# Altium PCB WX0.011.441PCB-4.2.PcbDoc (part 1 of 2)
Units mil, origin at the board's own origin, x right, y up, seen from the top; angles counter-clockwise.
Board outline 2922.34 x 6952.07 mil, 2 copper layers (Top Layer, Bottom Layer), stack 62.192 mil thick; 87 components, 60 nets, 354 pads, 196 vias.
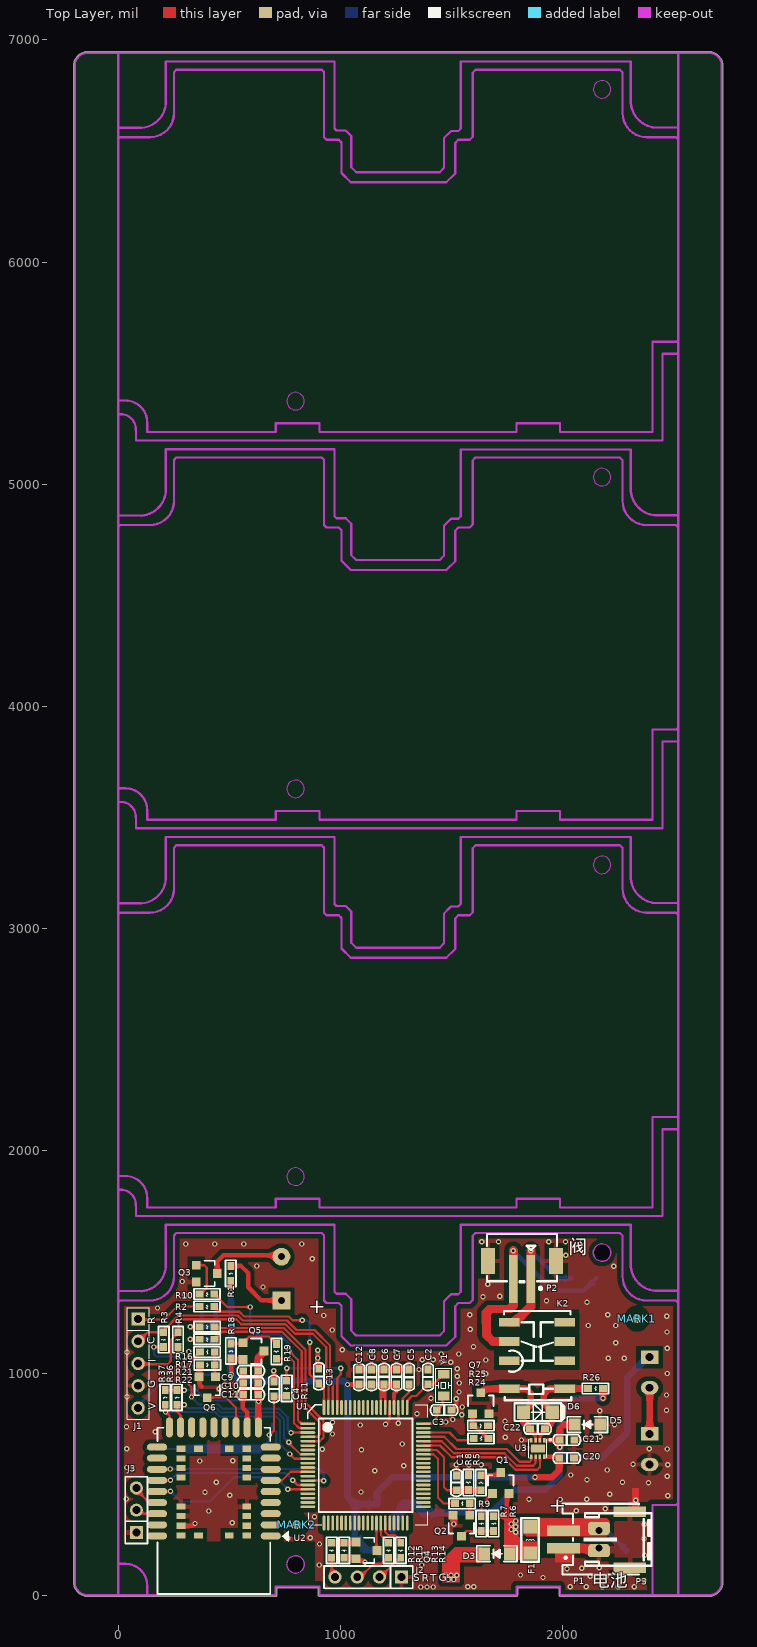
[diagram p0: Top Layer view]
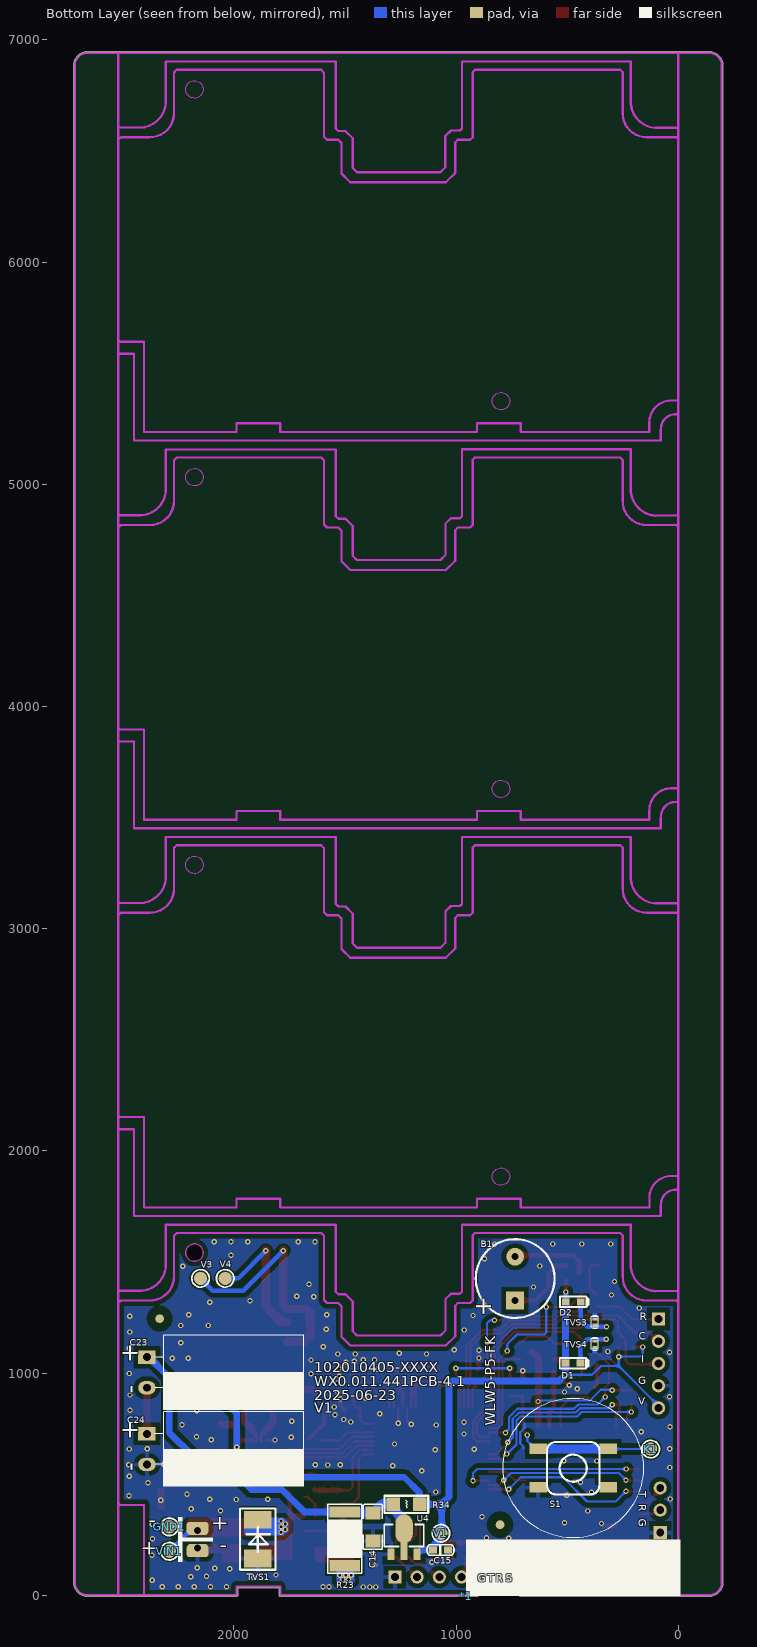
[diagram p1: Bottom Layer view, seen from below]

## Layer stack, top to bottom
Top Solder: solder mask 0.4, Solder Resist, Dk 3.5
Top Layer: signal copper 1.4
Dielectric1: dielectric 59.3921, FR-4, Dk 4.8
Bottom Layer: signal copper 1.4
Bottom Solder: solder mask 0.4, Solder Resist, Dk 3.5

## Board outline
-139.05,-4.95 ccw(c-138.25,0) -138.25,-5.01 708.66,-5.01 ccw(c708.66,0) 712.21,-3.54 ccw(c708.67,0.01) 713.68,0.01 713.68,34.36 900.5,34.36 900.5,0 ccw(c905.51,0) 905.51,-5.01 1791.34,-5.01 ccw(c1791.34,0) 1794.89,-3.54 ccw(c1791.35,0.01) 1796.36,0.01 1796.36,34.36 1983.18,34.36 1983.18,0 ccw(c1988.19,0) 1988.19,-5.01 2404,-5.01 ccw(c2404,0) 2404.27,-5.01 2519.31,-5.01 ccw(c2519.69,-0.01) 2519.69,-5.02 2657.94,-5.02 ccw(c2657.94,-0.01) 2658.74,-4.96 ccw(c2657.01,59.03) 2721.02,59.03 ccw(c2657.01,59.03) 2721.01,60.04 ccw(c2657.01,59.03) 2721.01,60.08 2721.01,59.96 2721.01,6882.02 ccw(c2716,6882.02) 2721.01,6882.32 ccw(c2656.99,6882.99) 2721.01,6882.99 ccw(c2656.99,6882.99) 2658.73,6946.98 ccw(c2657.93,6942.03) 2657.93,6947.04 0.99,6947.04 ccw(c0.99,6942.03) 0.49,6947.02 ccw(c0,6942.03) 0,6947.04 -138.25,6947.04 ccw(c-138.25,6942.03) -139.05,6946.98 ccw(c-137.31,6882.99) -201.32,6881.98 ccw(c-137.31,6882.99) -201.32,6881.94 -201.32,6882.02 -201.32,60.05 cw(c-137.31,59.04) -201.32,60.09 -201.32,60.05 ccw(c-137.31,59.04)
cut-out: 798,99.63 cw(c798,139) 758.63,139 cw(c798,139) 798,178.37 cw(c798,139) 837.37,139 cw(c798,139)
cut-out: 2177,1502.63 cw(c2177,1542) 2137.63,1542 cw(c2177,1542) 2177,1581.37 cw(c2177,1542) 2216.37,1542 cw(c2177,1542)

## Design rules (kind name [scope] priority, off if disabled: settings)
Clearance "Stitching GND" [IsStitchingVia and InNet('GND') vs (IsVia and (Not IsStitchingVia)) Or IsPad] p1: gap=5 ignorepadtopadclearanceinfootprint=FALSE except(0: Arc-Hole Track-Hole SMDPad-Hole THPad-Hole Via-Hole Fill-Hole Poly-Hole Region-Hole Text-Hole)
Clearance VIA-VIA [ISVIA vs ISVIA] p2: gap=20 ignorepadtopadclearanceinfootprint=FALSE except(0: Arc-Hole Track-Hole SMDPad-Hole THPad-Hole Via-Hole Fill-Hole Poly-Hole Region-Hole Text-Hole)
Clearance VIA-PAD [ISVIA vs ISPAD] p3: gap=15 ignorepadtopadclearanceinfootprint=FALSE except(0: Arc-Hole Track-Hole SMDPad-Hole THPad-Hole Via-Hole Fill-Hole Poly-Hole Region-Hole Text-Hole)
Clearance VIA-TRACK [ISVIA vs ISTRACK] p4: gap=15 ignorepadtopadclearanceinfootprint=FALSE except(0: Arc-Hole Track-Hole SMDPad-Hole THPad-Hole Via-Hole Fill-Hole Poly-Hole Region-Hole Text-Hole)
Clearance Polygon [InPolygon] p5: gap=20 ignorepadtopadclearanceinfootprint=FALSE except(0: Arc-Hole Track-Hole SMDPad-Hole THPad-Hole Via-Hole Fill-Hole Poly-Hole Region-Hole Text-Hole)
Clearance [All] p6: gap=7 ignorepadtopadclearanceinfootprint=FALSE except(0: Arc-Hole Track-Hole SMDPad-Hole THPad-Hole Via-Hole Fill-Hole Poly-Hole Region-Hole Text-Hole)
ComponentClearance [All] p1 off: gap=10 collisioncheckmode=3 verticalgap=10 showdistances=FALSE
FabricationTestPointUsage TestPointUsage [All] p1: valid=0 allowmultiple=FALSE
FabricationTestpoint Testpoint [(IsPad And (OnTopLayer Or OnBottomLayer))] p1: side=3 testpointundercomponent=TRUE minsize=40 maxsize=100 preferedsize=60 minholesize=0 maxholesize=40 preferedholesize=32 testpointgrid=1 allowsidetop=TRUE allowsidebottom=TRUE usegrid=TRUE gridtolerance=0.01
HoleSize [All] p1 off: absolutevalues=TRUE maxlimit=300 minlimit=0 maxpercent=80.000 minpercent=20.000
HoleToHoleClearance [All] p1 off: gap=10 allowstackedmicrovias=TRUE
LayerPairs [All] p1 off: enforce=TRUE
MinimumSolderMaskSliver [All] p1 off: minsoldermaskwidth=10
NetAntennae [All] p1 off: netantennaetolerance=0
PlaneConnect [All] p1: planeconnectstyle=Relief reliefexpansion=20 reliefentries=4 reliefconductorwidth=20 reliefairgap=10
PolygonConnect [isvia] p1: connectstyle=Direct reliefconductorwidth=15 reliefentries=4 polygonreliefangle="90 Angle" airgapwidth=10
PolygonConnect PolygonConnect_1 [All] p2: connectstyle=Relief reliefconductorwidth=20 reliefentries=4 polygonreliefangle="90 Angle" airgapwidth=20
RoutingVias [All] p1: holewidth=10 width=20 viastyle="Through Hole" minholewidth=5 minwidth=5 maxholewidth=50 maxwidth=100
SilkToBoardRegionClearance [All] p1 off:
SilkToSilkClearance [All] p1 off: silktosilkclearance=10
SilkToSolderMaskClearance [IsPad] p1 off: minsilkscreentomaskgap=10 clearancetoexposedcopper=TRUE
SolderMaskExpansion [All] p1: expansion=4
Width [All] p1: maxlimit=300 minlimit=8 preferedwidth=8
18 further rules are at their usual default settings.

## Classes and differential pairs
component class WX0.010.436DL: *1 B1 C1 C2 C3 C4 C5 C6 C7 C8 C9 C10 C11 C12 C13 C14 C15 C20 C21 C22 D1 D2 D3 D5 F1 GND1 J1 J2 J3 K1 K2 MARK1 MARK2 P1 P2 P3 Q1 Q2 Q3 Q4 Q5 Q6 Q7 R1 R2 R3 R4 R5 R6 R7 R8 R9 R10 R11 R12 R13 R14 R15 R16 R17 R18 R19 R21 R22 R23 R30 R34 R36 R37 S1 TVS1 TVS3 TVS4 U1 U2 U3 U4 V1 V3 V4 VIN1 Y1

## Components (designator, comment, footprint, x,y, rotation, side; value= is the part's Value field where it differs from the comment)
*1 "Bar Code1" "Bar Code1" 955,-4 r180 bottom
B1 "HYT-0903" HYT-0903 734,1327 r90 bottom
C1 "10pF/50V" CAP0603 1521,539 r270 top
C2 "12pF/50V" CAP0603 1393,950 r90 top
C3 "12pF/50V" CAP0603 1499,833 r180 top
C4 "100nF/50V" CAP0603 700,896 r90 top
C5 "100nF/50V" CAP0603 1308,949.64 r90 top
C6 "100nF/50V" CAP0603 1196.2,1015.14 r270 top
C7 "33pF/50V" CAP0603 1252.6,1015.14 r270 top
C8 "33pF/50V" CAP0603 1138.8,949.64 r90 top
C9 "10uF/10V" CAP0603 629,1010 r180 top
C10 "1uF/16V" CAP0603 629,956 r180 top
C11 "33pFF/16V" CAP0603 629,903 r180 top
C12 "100nF/50V" CAP0603 1082.4,949.64 r90 top
C13 "33pF/50V" CAP0603 902,953 r90 top
C14 "100uF/6V" GRM1206 1374,308 r0 bottom
C15 "1uF/16V" CAP0603 1103,204 r180 bottom
C20 "100nF/50V" CAP0603 2050.5,617.5 r180 top
C21 "100nF/50V" CAP0603 1985.5,699.5 r0 top (schematic designator C10)
C22 "100nF/50V" CAP0603 1919.5,748.5 r180 top (schematic designator C60)
C23 "1F/3V" CAPPC_350_800_1600R 2316,1170 r90 bottom
C24 "1F/3V" CAPPC_350_800_1600R 2316,825 r90 bottom
D1 "LED_T3R" "LED-SMD-0603 - SMT" 507,1045 r180 bottom
D2 "LED_T3R" "LED-SMD-0603 - SMT" 506,1321 r180 bottom
D3 "DS12W" SOD-123FL 1764,187 r180 top
D5 "DS12W" SOD-123FL 2171,768 r180 top (schematic designator D14)
D6 "1N4148" LL34 1888,824 r0 top
F1 "F1206" RES1206 1853,308 r270 top
GND1 "TEST-PAD" TEST-PAD 2290,308 r90 bottom
J1 "PIN254_1*5*WXHJ" PIN254_1*5SR 89,1243 r270 top
J2 "PIN254_1*4*WXHJ" PIN254_1*4*1100S 1275,82 r180 top
J3 "PIN254_1*3" PIN254_1*3*WXHJ 81,283 r90 top
K1 "TEST-PAD" TEST-PAD 124,658 r180 bottom
K2 "HFD4/3-SR" RELAY-SMD_HFD4-XX-SR 1884,1079 r90 top
MARK1 "MARK" MARK 2334,1245 r180 top
MARK2 "MARK" MARK 802,318 r90 top
P1 "" 2P_2.0mm 2003,211 r0 top locked
P2 "" SMT2-2.0_立贴 1817,1464 r180 top locked
P3 "PH200_1*2R" PH200_1*2R_BAT 2163,251 r90 top
Q1 "PNPS-9012" SOT-23 1721,505 r0 top
Q2 "NPNS-9013" SOT-23 1544,313 r180 top (schematic designator Q3)
Q3 "NPNS-9013" SOT-23 398,1448 r270 top (schematic designator Q2)
Q4 "NPNS-9013" SOT-23 1116,202 r270 top
Q5 "UT3401ZG" SOT-23 609,1099 r270 top
Q6 "NPNS-9013" SOT-23 400,936 r180 top
Q7 "NPNS-9013" SOT-23 1631,864 r0 top
R1 "51 1%" RES0603 506,1482 r270 top
R2 "100R 5%" RES0603 432,1299 r180 top
R3 "10K 5%" RES0603 204,1117 r90 top
R4 "10K 5%" RES0603 268,1117 r90 top
R5 "330K 5%" RES0603 1632,540 r270 top
R6 "10K 5%" RES0603 1688,289 r90 top (schematic designator R10)
R7 "10K 5%" RES0603 1633,289 r90 top (schematic designator R15)
R8 "220K 5%" RES0603 1575,474 r90 top (schematic designator R14)
R9 "3K 5%" RES0603 1514.63,413 r0 top (schematic designator R13)
R10 "3K 5%" RES0603 432,1355 r180 top
R11 "1K 5%" RES0603 757,898 r90 top
R12 "3K 5%" RES0603 960,169 r90 top
R13 "1K 5%" RES0603 1216,169 r90 top
R14 "1K 5%" RES0603 1271,169 r90 top
R15 "1K 5%" RES0603 1016,169 r90 top
R16 "1K 5%" RES0603 433,1208 r180 top
R17 "1K 5%" RES0603 433,1152 r180 top
R18 "2M 5%" RES0603 507,1133 r270 top
R19 "200K 5%" RES0603 711,1064 r90 top
R21 "3K 5%" RES0603 367,1095 r0 top
R22 "20K 5%" RES0603 434,1037 r180 top
R23 "10R 2W 1%" RES2512 1501,254 r90 bottom
R24 "4.7K 5%" RES0603 1599,706 r0 top
R25 "47K 5%" RES0603 1664,763 r180 top
R26 "10" RES0603 2114,931 r0 top
R34 "0R 5%" RES1206 1164,409 r0 bottom
R36 "10K 5%" RES0603 264,924 r270 top
R37 "10K 5%" RES0603 211,924 r270 top
S1 "SWT_4_600_600_430" SWS_4_600_600 472.74,572 r180 bottom
TVS1 "" DO-214AA 1892,160 r90 bottom
TVS3 "" ESD_DFN1006_2L 375,1242 r270 bottom (schematic designator D2)
TVS4 "" ESD_DFN1006_2L 375,1117 r90 bottom (schematic designator D2)
U1 "FM33LG0x8" LQFP80 1112.63,585 r0 top locked
U2 "L-NLEEB21-G5BP4" L-NLEEB21-G5BP4 686,267 r180 top locked
U3 "DRV8837DSGR" S-PWSON-N8 1887.5,660.5 r270 top (schematic designator U1)
U4 "CE6232A33P" SOT-89 1234,220 r180 bottom
V1 "TEST-PAD" TEST-PAD 1068,279 r180 bottom
V3 "TEST-PAD" TEST-PAD 2150,1426 r180 bottom
V4 "TEST-PAD" TEST-PAD 2039,1426 r180 bottom locked
VIN1 "TEST-PAD" TEST-PAD 2290,198 r0 bottom
Y1 "32.768kD" SMD-3215_2P 1464,995 r270 top

## Footprints (in the part's own frame and the unit in brackets; to place one, negate y for a bottom-side part, rotate by r counter-clockwise, add the part's x,y. Pads: shape width x height; smd on the part's side, far side on the other; paste and mask are expansions set on the pad)
2P_2.0mm [mm]
  rect 3.8x1.2 smd paste+0 mask+0.05: 1(0,0) 2(0,2)
  rect 3.7x1.2 smd paste+0 mask+0.05: 3(7.6,4.2) 4(7.6,-2.2)
  silkscreen extent -0.1,-3 9.18,5.1
"Bar Code1" [mil]
  silkscreen extent 0,0 965,256
CAP0603 [mil]
  rect 35x31 smd: 1(-0.49,0) 2(66.51,0)
  silkscreen extent -29,-24 94,23, body extent 1,-15 72,15, height 20
CAPPC_350_800_1600R [mm]
  rect 1.524x2 hole 0.9: 1(-2.5,1.905)
  oval 1.524x2 hole 0.9: 2(-6,1.905)
  silkscreen extent -8.5,-16 0,1.02, body extent -8.22,-15.94 -0.22,1.56, height 7.99
DO-214AA [mil]
  rect 80x125 smd: 1(5,0) 2(180,0)
  silkscreen extent -45,-80 230,80, body extent -13,-77 203,77, height 96
ESD_DFN1006_2L [mm]
  rect 0.3x0.6 smd paste+0 mask+0.05: 1(0,0) 2(0.65,0)
  silkscreen extent -0.43,-0.4 1.08,0.4
GRM1206 [mm]
  rect 1.728x1.485 smd: 1(0,-1.593) 2(0,1.593)
  silkscreen extent -1.09,-2.56 1.09,2.56
HYT-0903 [mil]
  rect 80x80 hole 32: 1(0,0)
  round 80 hole 32: 2(196.85,0)
  silkscreen extent -79,-177 276,177, body extent -78,-176 276,176, height 217
L-NLEEB21-G5BP4 [mm]
  oval 2.3x0.8 smd mask+0.051: 1(0,0) 2(0,-1.27) 3(0,-2.54) 4(0,-3.81) 5(0,-5.08) 6(0,-6.35) 7(0,-7.62) 8(0,-8.89) 9(0,-10.16) 19(13,-10.16) 20(13,-8.89) 21(13,-7.62) 22(13,-6.35) 23(13,-5.08) 24(13,-3.81) 25(13,-2.54) 26(13,-1.27) 27(13,0)
  oval 1.5x0.8 on Mech1 mask+0.051: 1(0.4,0) 2(0.4,-1.27) 3(0.4,-2.54) 4(0.4,-3.81) 5(0.4,-5.08) 6(0.4,-6.35) 7(0.4,-7.62) 8(0.4,-8.89) 9(0.4,-10.16) 19(12.6,-10.16) 20(12.6,-8.89) 21(12.6,-7.62) 22(12.6,-6.35) 23(12.6,-5.08) 24(12.6,-3.81) 25(12.6,-2.54) 26(12.6,-1.27) 27(12.6,0)
  rect 0.4x0.4 on Mech1 paste-2 mask+0.102: 1(10.22,1.04) 2(12.05,1.04)
  oval 0.8x1.5 on Mech1 mask+0.051: 10(1.42,-12.01) 11(2.69,-12.01) 12(3.96,-12.01) 13(5.23,-12.01) 14(6.5,-12.01) 15(7.77,-12.01) 16(9.04,-12.01) 17(10.31,-12.01) 18(11.58,-12.01)
  oval 0.8x2.3 smd mask+0.051: 10(1.42,-12.41) 11(2.69,-12.41) 12(3.96,-12.41) 13(5.23,-12.41) 14(6.5,-12.41) 15(7.77,-12.41) 16(9.04,-12.41) 17(10.31,-12.41) 18(11.58,-12.41)
  rect 1x0.7 smd: 28(10.25,-6.66) 29(10.25,-3.36) 30(10.25,-2.26) 31(10.25,-1.16) 32(10.25,-0.06) 33(8.25,-0.06) 34(4.75,-0.06) 35(2.75,-0.06) 36(2.75,-1.16) 37(2.75,-2.26) 38(2.75,-3.36) 39(2.75,-6.66) 40(2.75,-7.76) 41(2.75,-8.86) 42(2.75,-9.96) 43(4.75,-9.96) 44(8.25,-9.96) 45(10.25,-9.96) 46(10.25,-8.86) 47(10.25,-7.76)
  silkscreen extent -2.04,-12.36 12.95,6.64, body extent 0.05,-12.36 12.95,6.64, height 3
"LED-SMD-0603 - SMT" [mil]
  rect 35x31 smd: 1(0,0) 2(67,0)
  silkscreen extent -26,-24 104,23, body extent 0,-14 65,14, height 27
LL34 [mil] "1N4148"
  rect 60x60 smd: 1(-65,0) 2(65,0)
  silkscreen extent -105,-40 120,40, body extent -64,-29 74,30, height 61
LQFP80 [mm]
  oval 1.7x0.3 smd: 1(-6.6,4.75) 2(-6.6,4.25) 3(-6.6,3.75) 4(-6.6,3.25) 5(-6.6,2.75) 6(-6.6,2.25) 7(-6.6,1.75) 8(-6.6,1.25) 9(-6.6,0.75) 10(-6.6,0.25) 11(-6.6,-0.25) 12(-6.6,-0.75) 13(-6.6,-1.25) 14(-6.6,-1.75) 15(-6.6,-2.25) 16(-6.6,-2.75) 17(-6.6,-3.25) 18(-6.6,-3.75) 19(-6.6,-4.25) 20(-6.6,-4.75) 41(6.6,-4.75) 42(6.6,-4.25) 43(6.6,-3.75) 44(6.6,-3.25) 45(6.6,-2.75) 46(6.6,-2.25) 47(6.6,-1.75) 48(6.6,-1.25) 49(6.6,-0.75) 50(6.6,-0.25) 51(6.6,0.25) 52(6.6,0.75) 53(6.6,1.25) 54(6.6,1.75) 55(6.6,2.25) 56(6.6,2.75) 57(6.6,3.25) 58(6.6,3.75) 59(6.6,4.25) 60(6.6,4.75)
  oval 0.3x1.7 smd: 21(-4.75,-6.6) 22(-4.25,-6.6) 23(-3.75,-6.6) 24(-3.25,-6.6) 25(-2.75,-6.6) 26(-2.25,-6.6) 27(-1.75,-6.6) 28(-1.25,-6.6) 29(-0.75,-6.6) 30(-0.25,-6.6) 31(0.25,-6.6) 32(0.75,-6.6) 33(1.25,-6.6) 34(1.75,-6.6) 35(2.25,-6.6) 36(2.75,-6.6) 37(3.25,-6.6) 38(3.75,-6.6) 39(4.25,-6.6) 40(4.75,-6.6) 61(4.75,6.6) 62(4.25,6.6) 63(3.75,6.6) 64(3.25,6.6) 65(2.75,6.6) 66(2.25,6.6) 67(1.75,6.6) 68(1.25,6.6) 69(0.75,6.6) 70(0.25,6.6) 71(-0.25,6.6) 72(-0.75,6.6) 73(-1.25,6.6) 74(-1.75,6.6) 75(-2.25,6.6) 76(-2.75,6.6) 77(-3.25,6.6) 78(-3.75,6.6) 79(-4.25,6.6) 80(-4.75,6.6)
  silkscreen extent -6.62,-6.81 7.1,6.91, body extent -5.33,-5.33 5.36,5.33, height 2
MARK [mm]
  round 1 smd: 0(0,0)
  round 1 smd far side: 1(0,0)
  Top Layer pour cut-out: -1.5,0 -1.386,-0.574 -1.061,-1.061 -0.574,-1.386 0,-1.5 0,-1.5 0.574,-1.386 1.061,-1.061 1.386,-0.574 1.5,0 1.5,0 1.386,0.574 1.061,1.061 0.574,1.386 0,1.5 0,1.5 -0.574,1.386 -1.061,1.061 -1.386,0.574 -1.5,0
  Bottom Layer pour cut-out: -1.5,0 -1.386,-0.574 -1.061,-1.061 -0.574,-1.386 0,-1.5 0,-1.5 0.574,-1.386 1.061,-1.061 1.386,-0.574 1.5,0 1.5,0 1.386,0.574 1.061,1.061 0.574,1.386 0,1.5 0,1.5 -0.574,1.386 -1.061,1.061 -1.386,0.574 -1.5,0
PH200_1*2R_BAT [mm]
  rrect50% 1.2x2.5 all layers, no hole: 1(-1.397,0) 2(1.397,0)
  oval 1x2.5 hole 0.8: 1(-1,0) 2(1,0)
  silkscreen extent -3,-6 3,1.78, body extent -3.17,-6.22 3.18,1.78, height 5
PIN254_1*3*WXHJ [mm]
  rect 1.5x1.5 hole 0.9: 1(0,0)
  round 1.5 hole 0.9: 2(2.54,0) 3(5.08,0)
  silkscreen extent -1.27,-1.27 6.35,1.27
PIN254_1*4*1100S [mm] "Connector; Header; 4 Position"
  rect 1.5x1.5 hole 0.9: 1(0,0)
  round 1.5 hole 0.9: 2(2.54,0) 3(5.08,0) 4(7.62,0)
  silkscreen extent -1.27,-1.27 8.89,1.27, body extent -1.3,-1.3 8.86,1.24, height 8.54
PIN254_1*5SR [mil]
  rect 60x60 hole 35: 1(0,0)
  round 60 hole 35: 2(100,0) 3(200,0) 4(300,0) 5(400,0)
  silkscreen extent -50,-50 450,50
RELAY-SMD_HFD4-XX-SR [mm]
  rect 1x2.3 smd: 1(-3.8,-3.175) 2(-0.6,-3.175) 3(1.602,-3.175) 4(3.8,-3.175) 5(3.8,3.175) 6(1.6,3.175) 7(-0.6,3.175) 8(-3.8,3.175)
  silkscreen extent -5.11,-3.93 5.09,3.77
RES0603 [mil]
  rect 35x31 smd: 1(0,0) 2(67,0)
  silkscreen extent -26,-24 92,23, body extent 0,-15 71,15, height 12
RES1206 [mil]
  rect 60x60 smd: 1(0,0) 2(118.11,0)
  silkscreen extent -39,-39 157,39, body extent -28,-29 150,29, height 20
RES2512 [mil]
  rect 50.49x136.06 smd paste-3937.01 mask+2: 1(-120.72,0) 2(120.72,0)
  silkscreen extent -155,-77 155,77
S-PWSON-N8 [mm]
  rect 0.5x0.28 smd: 1(-0.95,0.75) 2(-0.95,0.25) 3(-0.95,-0.25) 4(-0.95,-0.75) 5(0.95,-0.75) 6(0.95,-0.25) 7(0.95,0.25) 8(0.95,0.75)
  rect 0.9x1.6 smd: 9(0,0)
  silkscreen extent -1.09,-1.05 1.04,1.52, body extent -0.98,-1 1.02,1, height 0.77
SMD-3215_2P [mm]
  rect 1x1.3 smd: 1(0,0) 2(2.5,0)
  silkscreen extent -0.69,-0.91 3.19,0.91, body extent -0.3,-0.99 2.9,0.99, height 0.7
SMT2-2.0_立贴 [mm]
  rect 1x5.5 smd mask+0.051: 1(-1,1.025) 2(1,1.025)
  rect 1.6x3 smd mask+0.051: 3(-3.9,-1.025) 4(3.9,-1.025)
  silkscreen extent -4,-4.1 4,2.25
SOD-123FL [mm]
  rect 1.3x1.4 smd: 1(0.074,0) 2(2.974,0)
  silkscreen extent -0.78,-0.9 3.82,0.9, body extent -0.28,-0.82 3.32,0.82, height 0.95
SOT-23 [mil]
  rect 40x40 smd: 1(-37.4,-47.24) 2(37.4,-47.24) 3(0,47.24)
  silkscreen extent -57,-12 57,35, body extent -57,-55 57,55, height 47
SOT-89 [mm]
  rect 0.8x1.27 smd: 1(-1.5,-0.9) 3(1.5,-0.9)
  rect 0.8x2.54 smd: 2(0,-0.265)
  oval 2x3.3 smd: 2(0,2)
  silkscreen extent -2.25,0 2.25,2.5, body extent -2.25,-1.02 2.25,2.92, height 1.4
SWS_4_600_600 [mm]
  rect 2x1.2 smd: 1(-4,2.2) 1(4,2.2) 2(-4,-2.2) 2(4,-2.2)
  silkscreen extent -3,-3 3,3, body extent -3.18,-3.18 3.18,3.18, height 4.5
TEST-PAD [mm]
  round 1.5 smd: 1(0,0)
  silkscreen extent -1,-1 1,1

## Part data
*1: library part "AD_WXHJ_Bar Code_02", "条形码 ,填充，无需焊接器件"
B1: library part 1010602-0007, "直插,直径9mm,高5.5mm,5 V,2 V,30 mA,兴化市华宇电子有限公司,HYT-0903"
C1: library part 101020103-0014, "10pF,50 V,±5%,0603,X7R,国巨,CC0603JRNPO9BN100"
C2 C3: library part 101020103-0005, "12P,50 V,±5%,0603,国巨,CC0603JRNPO9BN12"
C4 C5 C6 C12 C20 C21 C22: library part 101020103-0021, "104pF,50 V,±10%,0603,国巨,CC0603KRX7R9BB104"
C7 C8 C13: library part 101020103-0027, "33pF,50 V,±10%,0603,国巨,CC0603KRNPO9BN33"
C9: library part 101020103-0026, "106pF,10 V,±10%,0603,村田,GRM188R61A106KE47D"
C10 C11 C15: library part 101020103-0003, "105pF,16 V,±10%,0603,国巨,CC0603KRX7R7BB105"
C14: library part 101020102-0012, "226P,10 V,±20%,0805,村田电子有限公司,GRM21BR61A226ME51L"
C23 C24: library part 1010202-0015, "1F,2.75 V,-20%~+20%,8mm*16mm,红宝石,2.7 DMC 1 M MY4 8X16"
D1 D2: library part 101040102-0001, "圆形插件,3mm 圆形,插件,红光,湖北匡通电子有限公司,3BB4HC"
D3 D5: library part 101040101-0055, "DS36W,SOD123-FL,3 A,42 V,60 V,浙江领晨科技有限公司,DS36W"
D6: library part DIODE, "二极管，Diode"
GND1 K1 V1 V3 V4 VIN1: library part AD_WXHJ_TEST-PAD_01, "单面焊盘测试点"
J1: library part AD_WXHJ_PinHeader_02, "1*5 ，Φ1.0 ，2.54mm，直脚,无需焊接器件"
J2: library part AD_WXHJ_PinHeader_01, "1*4 ，Φ1.0 ，2.54mm，直脚,无需焊接器件"
MARK1 MARK2: library part AD_WXHJ_MARK_01, "MARK点"
P1 P2: library part SMT_2.0_卧
P3: "2.0-2AW,直插弯座，2PIN，脚间距2mm，带防翘起,公头,单排,2.0-2AW;直插弯座，2PIN,脚间距2mm，带防翘起"
Q1: library part 101040201-0001, "9012,PNP,SOT-23,JCET;长电,S9012"
Q2 Q3 Q4 Q6 Q7: library part 101040201-0002, "9013,NPN,SOT-23,长电,S9013"
Q5: library part 101040201-0013, "UT3401ZG,P-MOS,SOT-23,UTC,UT3401ZG"
R1: library part 101010103-0037, "国巨,±5%,0603,,155 ℃,-55 ℃,RC0603JR-0751RL,无铅,100 ppm/℃,1/10W,,51欧"
R2: library part 101010103-0022, "100R,±5%,1/10W,0603,国巨,RC0603JR-07100RL"
R3 R4 R6 R7 R36 R37: library part 101010103-0003, "国巨,±5%,0603,,155 ℃,-55 ℃,RC0603JR-0710KL,无铅,200 ppm/℃,1/10W,,10K"
R5: library part 101010103-0066, "330K,±5%,1/10W,0603,国巨,RC0603JR-07330KL"
R8: library part 101010103-0044, "220K,±5%,1/10W,0603,国巨,RC0603JR-07220KL"
R9 R10 R11 R12 R21 R24 R26: library part 101010103-0006, "国巨,±5%,0603,,155 ℃,-55 ℃,RC0603JR-073KL,无铅,100 ppm/℃,1/10W,,3K"
R13 R14 R15 R16 R17 R34: library part 101010103-0008, "1K,±5%,1/10W,0603,国巨,RC0603JR-071KL"
R18: library part 101010103-0025, "国巨,±5%,0603,,155 ℃,-55 ℃,RC0603JR-072ML,含铅,100 ppm/℃,1/10W,,2M"
R19: library part 101010103-0003, "10K±5%,1/10W,0603"
R22 R25: library part 101010103-0004, "国巨,±5%,0603,,155 ℃,-55 ℃,RC0603JR-0720KL,无铅,200 ppm/℃,1/10W,,20K"
R23: library part 101010105-0001, "0.5Ω,±1%,1W,2512,国巨,RC2512FR-070R5L"
S1: library part 1011001-0027, "TS-1102,机械轻触,6*6*4.3直插,6*6*4.3直插,乐清市羽欧电子"
TVS1 TVS3 TVS4: library part SMBJ12CA
U3: library part 101050101-0060, "DRV8837DSGR,S-PWSON-N8,TI,DRV8837DSGR"
U4: library part 02_CE6232A33P
Y1: library part 1010601-0009

## Via types
v1: diameter 24, hole 12, Top Layer to Bottom Layer, tented both sides, 196 vias

## Nets (pads, with @x,y where several pads share a name; then routed paths per layer and width w, separated by ;. In a path a pad name is that pad's centre, name@x,y a point inside that pad or via, vN(x,y) a via of type N, cw(c..) or ccw(c..) an arc to the next point about the centre after c; other vN are vias at no path point)
ADC_CTL_1: R9.1 U1.53 | length 335.7
  Top Layer w10: U1.53@1372.47,634.21 1417.79,634.21 1438,614 1438,440 1465,413 R9.1@1514.63,413
BLE_CTL: R19.1 U1.2 | length 431.7
  Top Layer w10: R19.1@711,1064 776,1064 791,1049 791,774.5 813.18,752.32 U1.2@852.79,752.32
BLE_RST: R21.1 U1.3 | length 855.6
  Top Layer w10: v1(329,892) 329,936.25 311,954.25 311,1039 R21.1@367,1095 ; v1(777,732) 777.64,732.64 U1.3@852.79,732.64
  Bottom Layer w10: v1(329,892) 362,859 449.08,859 469.08,839 724,839 762,801 762,747 v1(777,732)
BUSY: U1.16 U2.23@174.19,467 | length 765.7
  Top Layer w10: U2.23@174.19,467 234,467 v1(235,468) ; v1(763,477) 763.27,476.73 U1.16@852.79,476.73
  Bottom Layer w10: v1(235,468) 281,422 411,422 520,531 709,531 v1(763,477)
BUZZ: R10.1 U1.1 | length 909.4
  Top Layer w10: R10.1@431,1356 490,1297 v1(594,1297) ; v1(769,1099) 808,1060 808,787.5 823.49,772.01 U1.1@852.79,772.01
  Bottom Layer w10: v1(594,1297) 594,1182 602,1174 726,1174 769,1131 v1(769,1099)
DELAY_CTL: R24.1 U1.58 | length 252.9
  Top Layer w10: U1.58@1372.47,732.64 1490.36,732.64 1525,698 R24.1@1611,698
DOUT: U1.15 U2.22@174.19,517 | length 714.5
  Top Layer w10: U2.22@174.19,517 v1(235,517) ; v1(785,518) 806.58,496.42 U1.15@852.79,496.42
  Bottom Layer w10: v1(235,517) 268,550 753,550 v1(785,518)
GND: C1.1 C2.2 C3.1 C4.2 C5.2 C6.1 C7.1 C8.2 C9.2 C10.2 C11.2 C12.2 C13.2 C14.2 C15.2 C20.1 C21.2 C24.2 D5.1 GND1.1 J1.4 J2.1 J3.1 P1.1 P1.3 P1.4 P2.3 P2.4 P3.1 Q2.2 Q3.2 Q4.2 Q6.2 Q7.2 R8.2 R15.1 R22.2 R25.1 S1.2 TVS1.1 TVS3.1 TVS4.1 U1.63 U1.65 U2.11@580.09,755.58 U2.29 U2.30 U2.31 U2.38 U3.4 U3.9 U4.1 | length 1588.1
  Top Layer w10: 275,1033 317,1075 v1(317,1097) ; v1(491,945) 502,956 560,956 C10.2@562.49,956 ; v1(1202,769) 1220.9,787.9 U1.65@1220.9,844.84 ; v1(1260,774) 1260.27,774.27 U1.63@1260.27,844.84
  Top Layer w20: U2.31@282.46,312.67 334.67,312.67 v1(345,323) ; R22.2@367,1037 365.6,1035.6 365.6,949.4 376,939 ; C9.2@560,1005 560,956 560,843 580.09,822.91 U2.11@580.09,755.58 ; C4.2@700,962.51 v1(700,1011) v1@701,1012 ; v1(897,1102) v1(897,1068) 897,1024.51 C13.2@902,1019.51 C13.2@905,1016.51 ; R15.1@1016,169 Q4.2@1068.76,169 ; Q4.2@1068.76,164.6 1078.35,155 1104,155 v1(1110,149) ; C12.2@1082.4,1016.14 C8.2@1138.8,1016.14 C5.2@1308,1016.14 ; C3.1@1499.49,833 1520.63,854.14 1520.63,856.25 1521,856.62 v1(1521,884)
  Top Layer w30: v1(1510,321) Q2.2@1510,342.84
  Top Layer w39.37: P1.1@1986,211 P1.1@2003,211 P3.1@2165,211
  Bottom Layer w10: 691,772 691,754.25 711,734.25 711,682.96 697,668.96 697,663
  other v1: 1361,37 1389,37 1417,37 1572,38 1599,38 2033,39 2105.25,39 2177.5,39 2249.75,39 2322,39 2367,68 1911,80 2194,84 2123,86 1810,91 2019,120 2086,121 2164,124 904,136 1365,136 2368,180 1373,181 905,231 2366,254 763,256 863,259 2367,320 512,327 883,353 407,379 2060,381 2191,390 2329,428 1989,431 1848,432 2108,432 36,433 2472,448 502,450 2211,454 390,463 1092,465 2386,506 440,509 2269,509 2109,520 2471,536 2036,541 1154,560 2200,564 38,575 1285,583 1578,586 1633,587 2473,587 1521,588 2316,589 366,604 515,605 1094,655 918,657 2471,658 2390,659 38,660 1277,681 1814.5,698.5 2102,700 1741,711 2168,713 964,726 166,736 37,759 1089,766 2233,768 964,778 1474,780 1740,783 1505,791 1545,812 1344,817 2167,831 2467,833 1548,847 1407,887 39,893 2467,901 512,915 1533,915 454,930 1534,955 1525,986 1653,997 2471,998 1353,1016 1525,1019 1496,1049 1458,1053 1653,1059 1367,1060 1417,1060 2205,1066 2277,1066 1133,1086 1453,1086 1532,1086 1255,1089 39,1093 1008,1105 2470,1112 1598,1118 2239,1136 2469,1185 963,1194 1584,1197 2115,1214 2239,1214 2468,1255 924,1259 1582,1262 2203,1263 176,1293 2109,1319 1927,1326 1641,1344 1717,1345 300,1351 651,1387 1662,1400 287,1412 2230,1481 623,1482 872,1514 2013,1530 304,1581 434.4,1581 564.8,1581 825.6,1581 1635,1591 1710.5,1591 1937,1591 2012.5,1591 2088,1591
KEY_INTP0: R11.2 U1.77 | length 485
  Top Layer w10: R11.2@757,965 757,1016 v1(758,1022) ; U1.77@984,844.16 U1.77@984.68,844.84 984.68,977.68 1001,994 v1(1001,1022)
  Bottom Layer w10: v1(758,1022) v1(1001,1022)
LED1: R16.1 U1.5 | length 958.8
  Top Layer w10: R16.1@432,1208 437,1203 744,1203 842,1105 842,866.04 923.48,784.57 923.48,710.48 906.27,693.27 U1.5@852.79,693.27
LED2: R17.1 U1.4 | length 909.2
  Top Layer w10: R17.1@433,1151 468,1186 736.96,1186 825,1097.96 825,859 906.48,777.52 906.48,723.48 895.95,712.95 U1.4@852.79,712.95
NetB1_1: B1.1 R1.1 | length 332.7
  Top Layer w20: R1.1@503,1482 R1.1@506,1482 552,1482 584,1450 584,1386 643,1327 B1.1@734,1327
NetB1_2: B1.2 Q3.3 | length 357
  Top Layer w20: Q3.3@445.24,1448 445.24,1502.24 473,1530 727.85,1530 B1.2@734,1523.85
NetC4_1: C4.1 K1.1 R11.1 S1.1 | length 837.6
  Top Layer w10: v1(679,721) 700,742 C4.1@700,895.51 754.51,895.51 R11.1@757,898
  Bottom Layer w10: K1.1@124,658 314.65,658 S1.1@315.26,658.61 ; S1.1@630.22,658.61 642.61,658.61 679,695 v1(679,721)
  Bottom Layer w40: S1.1@315.26,658.61 S1.1@630.22,658.61
NetC5_1: C5.1 U1.62 | length 115.9
  Top Layer w10: U1.62@1279.95,844.84 1279.95,885.95 1308,914 C5.1@1308,949.14
NetC22_1: C22.1 D6.2 K2.1 R26.1 U3.2 | length 396.3
  Top Layer w30: C22.1@1919.99,748.5 1953,781.51 D6.2@1953,824 1915,862 1915,906 1938.4,929.4 K2.1@2009,929.4 2010.59,931 R26.1@2114,931
NetC22_2: C22.2 D6.1 K2.8 Q7.3 U3.3 | length 427.5
  Top Layer w30: Q7.3@1631,911.24 1649.14,929.39 K2.8@1759,929.39 1835.61,929.39 1856,909 1856,857 D6.1@1823,824 1823,778.5 C22.2@1852.99,748.5
NetC23_2: C23.2 C24.1 | length 207.2
  Top Layer w30: C24.1@2391,726.57 C23.2@2391,933.78
NetD1_2: D1.2 R17.2 TVS4.2 | length 246.8
  Top Layer w20: v1(324,1152) R17.2@366,1152
  Bottom Layer w20: v1(324,1152) 409,1152 440,1121 D1.2@440,1045
NetD2_2: D2.2 R16.2 TVS3.2 | length 254.4
  Top Layer w20: v1(323,1208) R16.2@366,1208
  Bottom Layer w20: v1(323,1208) 409,1208 439,1238 D2.2@439,1321
NetD3_2: D3.2 R23.1
  other v1: 1484,71 1510,71 1471,90 1497,90 1523,90
NetJ1_1: J1.1 R2.2 | length 314.8
  Top Layer w10: J1.1@78,1250 87,1241 204.96,1241 262.96,1299 R2.2@365,1299
NetJ2_2: J2.2 R14.1 | length 134.7
  Top Layer w10: J2.2@1175,83 1181,83 R14.1@1272,174
NetJ2_3: J2.3 R13.1 | length 178.7
  Top Layer w10: J2.3@1075,83 1090,83 1149,142 1184,142 R13.1@1216,174
NetJ2_4: J2.4 R12.1 | length 92.2
  Top Layer w10: R12.1@960,169 960,98 J2.4@975,83
NetK2_5: K2.5 P2.1 V4.1 | length 614
  Top Layer w40: K2.5@1759,1228.62 1784.61,1228.62 1856.37,1300.37 P2.1@1856.37,1423.65 1856.37,1551.37 1856,1551 v1(1856,1550)
  Bottom Layer w20: v1(1856,1550) 1980,1426 V4.1@2039,1426
NetK2_6: K2.6 P2.2 V3.1 | length 927.8
  Top Layer w40: 1656,1248 1656,1172 1685.99,1142.01 K2.6@1759,1142.01 ; 1764,1291 1777.63,1304.63 P2.2@1777.63,1423.65 1777.63,1550.63 1777.26,1551 v1(1777,1551)
  Bottom Layer w20: v1(1777,1551) 1957,1371 2095,1371 V3.1@2150,1426
NetQ1_1: Q1.1 R7.2 | length 116.5
  Top Layer w10: R7.2@1634,356 1634,409 1667.6,442.6 Q1.1@1683.6,442.6
NetQ1_3: Q1.3 R5.1 | length 102.6
  Top Layer w10: R5.1@1632,535 1637,540 R5.1@1638,541
  Top Layer w20: R5.1@1632,540 1637,540 1708.76,540 Q1.3@1721,552.24
NetQ2_1: Q2.1 R9.2 | length 35.4
  Top Layer w10: Q2.1@1581.63,377.63 R9.2@1581.63,413
NetQ2_3: Q2.3 R6.1 R7.1 | length 153.6
  Top Layer w10: Q2.3@1544,265.76 1567.24,289 R7.1@1633,289 R6.1@1688,289
NetQ3_1: Q3.1 R10.2 | length 184.7
  Top Layer w10: Q3.1@354.76,1485.4 386.6,1485.4 398,1474 398,1382 372,1356 R10.2@364,1356
NetQ4_1: Q4.1 R12.2 R15.2 | length 110.2
  Top Layer w20: R12.2@960,236 R15.2@1016,236 1065.35,236 Q4.1@1068.76,239.4
NetQ5_1: Q5.1 R18.1 R19.2 | length 238.4
  Top Layer w10: R18.1@508,1133 558.35,1133 Q5.1@561.76,1136.4 561.76,1136.76 590,1165 677,1165 R19.2@711,1131 712,1130 R19.2@712,1136.4
NetQ6_1: Q6.1 R21.2 R22.1 | length 112.4
  Top Layer w10: R21.2@434,1094 R22.1@434,1037 434,990.65 Q6.1@440.4,984.24
NetQ7_1: Q7.1 R24.2 R25.2 | length 147.8
  Top Layer w15: Q7.1@1593.6,816.76 1593.6,766.4 R25.2@1597,763 1604,763 1661,706 R24.2@1666,706
PWR: U1.14 U2.21@174.19,567 | length 862.3
  Top Layer w10: U2.21@174.19,567 233,567 v1(234,568) ; U1.14@852.79,516.1 923.9,516.1 v1(924,516)
  Bottom Layer w10: v1(234,568) 905,568 924,549 v1(924,516)
PWR_CTL: U1.12 U2.6@686,517 | length 182.7
  Top Layer w10: U2.6@686,517 737,517 775.47,555.47 U1.12@852.79,555.47
RESET: Q6.3 U2.12@530.09,755.58 | length 233.8
  Top Layer w10: Q6.3@403,889.76 483.24,889.76 530.09,842.91 U2.12@530.09,755.58
RST: C13.1 R2.1 U1.80 | length 866
  Top Layer w10: R2.1@432,1299 455,1276 545,1276 567,1254 768,1254 784,1238 v1(827,1238) ; v1(861,1138) 861,993.51 C13.1@902,952.51 925.62,928.89 U1.80@925.62,844.84
  Bottom Layer w10: v1(827,1238) 847,1238 861,1224 v1(861,1138)
RXD1: R13.2 U1.34 | length 103.4
  Top Layer w10: U1.34@1181.53,325.16 1181.53,270.47 R13.2@1216,236
RXD_0: R36.2 U1.8 U2.17@280.09,755.58 | length 854
  Top Layer w10: U2.17@281,756.49 U2.17@280.09,755.58 280.09,809.91 264,826 R36.2@264,857 264,866 272,858 v1(297,858) ; v1(767,688) 767,685.25 818.04,634.21 U1.8@852.79,634.21
  Bottom Layer w10: v1(297,858) 313,842 442.04,842 462.04,822 716.96,822 745,793.96 745,710 v1(767,688)
S_R: J3.2 U2.25@174.19,367 | length 137.3
  Top Layer w10: J3.2@60,397 J3.2@77.5,379.5 ; J3.2@73,400 J3.2@82,391 ; J3.2@81,383 90,374 107,374 114,367 U2.25@174.19,367
S_T: J3.3 U2.24@174.19,417 | length 137.2
  Top Layer w10: J3.3@60,497 J3.3@65,492 ; J3.3@74,483 J3.3@77.5,479.5 ; J3.3@81,483 81,475 139,417 U2.24@174.19,417
SET: Q4.3 U1.33 | length 140.8
  Top Layer w10: Q4.3@1161.84,191.4 Q4.3@1161.84,202 ; Q4.3@1161.84,211.4 U1.33@1161.84,325.16 ; Q4.3@1163.24,202 1163.24,210 Q4.3@1169.24,204
SLEEP: U1.55 U3.7 | length 621.7
  Top Layer w10: U1.55@1372.47,673.58 1447.42,673.58 1500,621 1731,621 1787,565 1885,565 1897.34,577.34 U3.7@1897.34,623.1 U3.7@1898,622.44
SWCLK: J1.2 R3.2 U1.78 | length 1264.5
  Top Layer w10: J1.2@78,1150 98,1150 132,1184 R3.2@204,1184 204,1192 271,1259 537.96,1259 559.96,1237 759.12,1237 802.12,1194 882.3,1194 953,1123.3 953,958 964.99,946.01 U1.78@964.99,844.84
SWIO: J1.3 R4.2 U1.79 | length 1355.8
  Top Layer w10: J1.3@78,1050 88,1040 222,1040 236,1054 236,1149 271,1184 271,1230 283,1242 530.92,1242 552.92,1220 752.08,1220 795.08,1177 875.25,1177 936,1116.25 936,950.96 945.31,941.65 U1.79@945.31,844.84
TXD1: R14.2 U1.35 | length 135.1
  Top Layer w10: U1.35@1201.21,325.16 1201.21,284.79 1215,271 1244,271 1271,244 R14.2@1271,236
TXD_0: R37.2 U1.9 U2.18@230.09,755.58 | length 940.2
  Top Layer w10: R37.2@211,857 211,826 v1(212,825) ; v1@214,825 230,809 230,802 ; U2.18@230,761.49 230,802 ; U2.18@230.09,755.58 230.09,801.91 230,802 ; v1(771,636) 792.47,614.53 U1.9@852.79,614.53
  Bottom Layer w10: v1(212,825) 435,825 456,804 710.92,804 728,786.92 728,679 v1(771,636)
V3.6: C14.1 C21.1 C23.1 D5.2 R23.2 R26.2 R34.2 U3.1 U4.2 | length 2370.4
  Top Layer w30: v1@1986.41,666.5 1986.41,751.41 2003,768 D5.2@2053.91,768 D5.2@2060,774.09 ; v1(2181,887) R26.2@2181,929
  Bottom Layer w30: C14.1@1374,370.7 1496.98,370.7 R23.2@1501,374.72 1682.72,374.72 1783,475 1921,475 1986.5,540.5 1986.5,622 ; v1(2181,887) 2055,887 1986.5,818.5 v1(1986.5,666.5) 1986.5,622 ; C23.1@2391,1071.57 2381.57,1071.57 2291,981 2291,733 2180,622 1986.5,622
  Bottom Layer w40: U4.2@1234,298.74 1234,341 1282.11,389.11 1282.11,411 1333.7,411 C14.1@1374,370.7
VALVE: U1.56 U3.6 | length 584.7
  Top Layer w10: U1.56@1372.47,693.27 1455.73,693.27 1510,639 1737.04,639 1793.04,583 1867,583 1877.66,593.66 U3.6@1877.66,623.1
VALVE2: U1.57 U3.5 | length 549.9
  Top Layer w10: U1.57@1372.47,712.95 1467.05,712.95 1522,658 1748,658 1805,601 1851,601 1857.97,607.97 U3.5@1857.97,623.1
VCC: C6.2 C7.2 C8.1 C12.1 C15.1 C20.2 D1.1 D2.1 J1.5 Q5.2 R1.2 R3.1 R4.1 R18.2 R34.1 U1.64 U1.66 U1.67 U3.8 U4.3 V1.1 | length 4690.6
  Top Layer w10: v1@167,1117 R3.1@204,1117 ; v1(268,1074) R4.1@268,1117 ; U1.67@1181.53,844.84 C6.2@1181.53,933.96 ; U1.66@1201.21,844.84 C6.2@1201.21,948.64 ; U1.64@1240.58,844.84 1240.58,889
  Top Layer w20: R1.2@503,1415 506,1412 v1(506,1365) ; v1(508,992) 508,1066 512.4,1061.6 Q5.2@561.76,1061.6 ; v1(1031.36,948.64) C6.2@1196.2,948.64 1201.21,948.64 C7.2@1252.6,948.64 1252.6,919.6 1240.58,907.58 1240.58,889
  Top Layer w30: v1(1875,531) 1952,531 1983.99,562.99 C20.2@1983.99,617.5
  Bottom Layer w10: J1.5@78,850 80,848 J1.5@94,848 ; J1.5@89,843 J1.5@94,848 ; v1(160,1117) 160,1085 171,1074 v1(268,1074) 268,1032 ; v1(508,992) 388,992 348,1032 268,1032 ; J1.5@94,848 94,858 268,1032
  Bottom Layer w20: J1.5@69,848 J1.5@80,848 ; D2.1@506,1321 v1(506,1365) ; v1(508,992) D2.1@508,1319
  Bottom Layer w30: D2.1@506,1321 507,1320 D1.1@507,1045 507,993 v1(508,992) 536,964 1016,964 v1(1031.36,948.64) 1031.36,442.64 1064,410 ; C15.1@1103.49,204 1121,204 ; R34.1@1164,409 R34.1@1164,410 ; U4.3@1174.94,184.57 1155.51,204 1121,204 ; v1(1875,531) 1233,531 1164,462 R34.1@1164,410 ; 1064,410 1064,261 1121,204 ; 1064,410 R34.1@1164,410
VDD_BLE: C9.1 C10.1 C11.1 Q5.3 R36.1 R37.1 U2.10@630.09,755.58 | length 850
  Top Layer w10: R37.1@211,924 212,923 v1(297,923) ; U2.10@630.09,755.58 630.09,777.09 U2.10@634,781
  Top Layer w20: C11.1@630.09,900 C10.1@630.09,946
  Top Layer w30: U2.10@630.09,777.09 630.09,900 629.47,900.62 627,900.62 627,1066.76 Q5.3@656.24,1096
  Bottom Layer w10: v1(297,923) 299,925 349.25,925 398.25,876 627,876 v1(631,872)
VIN: D3.1 F1.2 Q1.2 R6.2 TVS1.2 | length 203.7
  Top Layer w20: R6.2@1688,356 1748.01,356 ; 1748.01,326.01 1748.01,455.01 Q1.2@1758.4,465.4
  other v1: 1788,283 1768,296 1788,308.5 1768,321 1788,334
VIN1: F1.1 P1.2 P3.2 VIN1.1 | length 320.3
  Top Layer w78.74: P1.2@2019.26,306 P3.2@2163,306
  Bottom Layer w20: P3.2@2163,290.37 2197.63,290.37 VIN1.1@2287,201 ; VIN1.1@2282,196 VIN1.1@2287,201 ; VIN1.1@2290,198 VIN1.1@2287,201 ; VIN1.1@2290,204 VIN1.1@2287,201
VIN_ADC_1: C1.2 R5.2 R8.1 U1.54 | length 478.1
  Top Layer w10: 1430.41,653.9 U1.54@1372.47,653.9 1433.1,653.9 1465,622 1465,487 1479.51,472.49 C1.2@1521,472.49
  Top Layer w20: C1.2@1521,474 1522,473 R5.2@1632,473 ; R5.2@1632,474 R5.2@1638,474
XT1: C2.1 U1.61 Y1.1 | length 244
  Top Layer w10: U1.61@1299.64,844.84 1299.64,874.64 1322,897 1340.49,897 C2.1@1393,949.51 1418.51,949.51 Y1.1@1464,995
XT2: C3.2 U1.60 Y1.2 | length 183.7
  Top Layer w10: U1.60@1372.47,772.01 1417.01,772.01 1432.49,787.49 C3.2@1432.49,833 ; C3.2@1431,840.56 1442.56,840.56 1460,858 Y1.2@1460,893.57
pads on no net: K2.2 K2.3 K2.4 K2.7 MARK1.0 MARK1.1 MARK2.0 MARK2.1 U1.6 U1.7 U1.10 U1.11 U1.13 U1.17 U1.18 U1.19 U1.20 U1.21 U1.22 U1.23 U1.24 U1.25 U1.26 U1.27 U1.28 U1.29 U1.30 U1.31 U1.32 U1.36 U1.37 U1.38 U1.39 U1.40 U1.41 U1.42 U1.43 U1.44 U1.45 U1.46 U1.47 U1.48 U1.49 U1.50 U1.51 U1.52 U1.59 U1.68 U1.69 U1.70 U1.71 U1.72 U1.73 U1.74 U1.75 U1.76 U2.1 U2.2 U2.3 U2.4 U2.5 U2.6@670.25,517 U2.7 U2.8 U2.9 U2.10@630.09,739.83 U2.11@580.09,739.83 U2.12@530.09,739.83 U2.13 U2.14 U2.15 U2.16 U2.17@280.09,739.83 U2.18@230.09,739.83 U2.19 U2.20 U2.21@189.94,567 U2.22@189.94,517 U2.23@189.94,467 U2.24@189.94,417 U2.25@189.94,367 U2.26 U2.27 U2.28 U2.32 U2.33 U2.34 U2.35 U2.36 U2.37 U2.39 U2.40 U2.41 U2.42 U2.43 U2.44 U2.45 U2.46 U2.47

## Polygon pours and split planes (outlines as drawn)
GND on Bottom Layer "G2-No Net" (solid, remove dead copper, pour order 2): 244.39,1636 2269.69,1636 2519.69,1386 2519.69,2 1.56,2 -0.61,-0.17 0,0.44 0,1353.13
GND on Top Layer "G2-No Net" (solid, remove dead copper, pour order 4): 250.39,1634 2283,1634 2519.69,1397.31 2519.69,1326.8 2519.69,2 0,2 0,1344.19